# Altium PCB PCB1.PcbDoc (part 3 of 3)
Units mm, origin at the board's own origin, x right, y up, seen from the top; angles counter-clockwise.
Board outline 152.4 x 101.6 mm, 2 copper layers (Top Layer, Bottom Layer); 246 components, 0 nets, 683 pads, 311 vias.
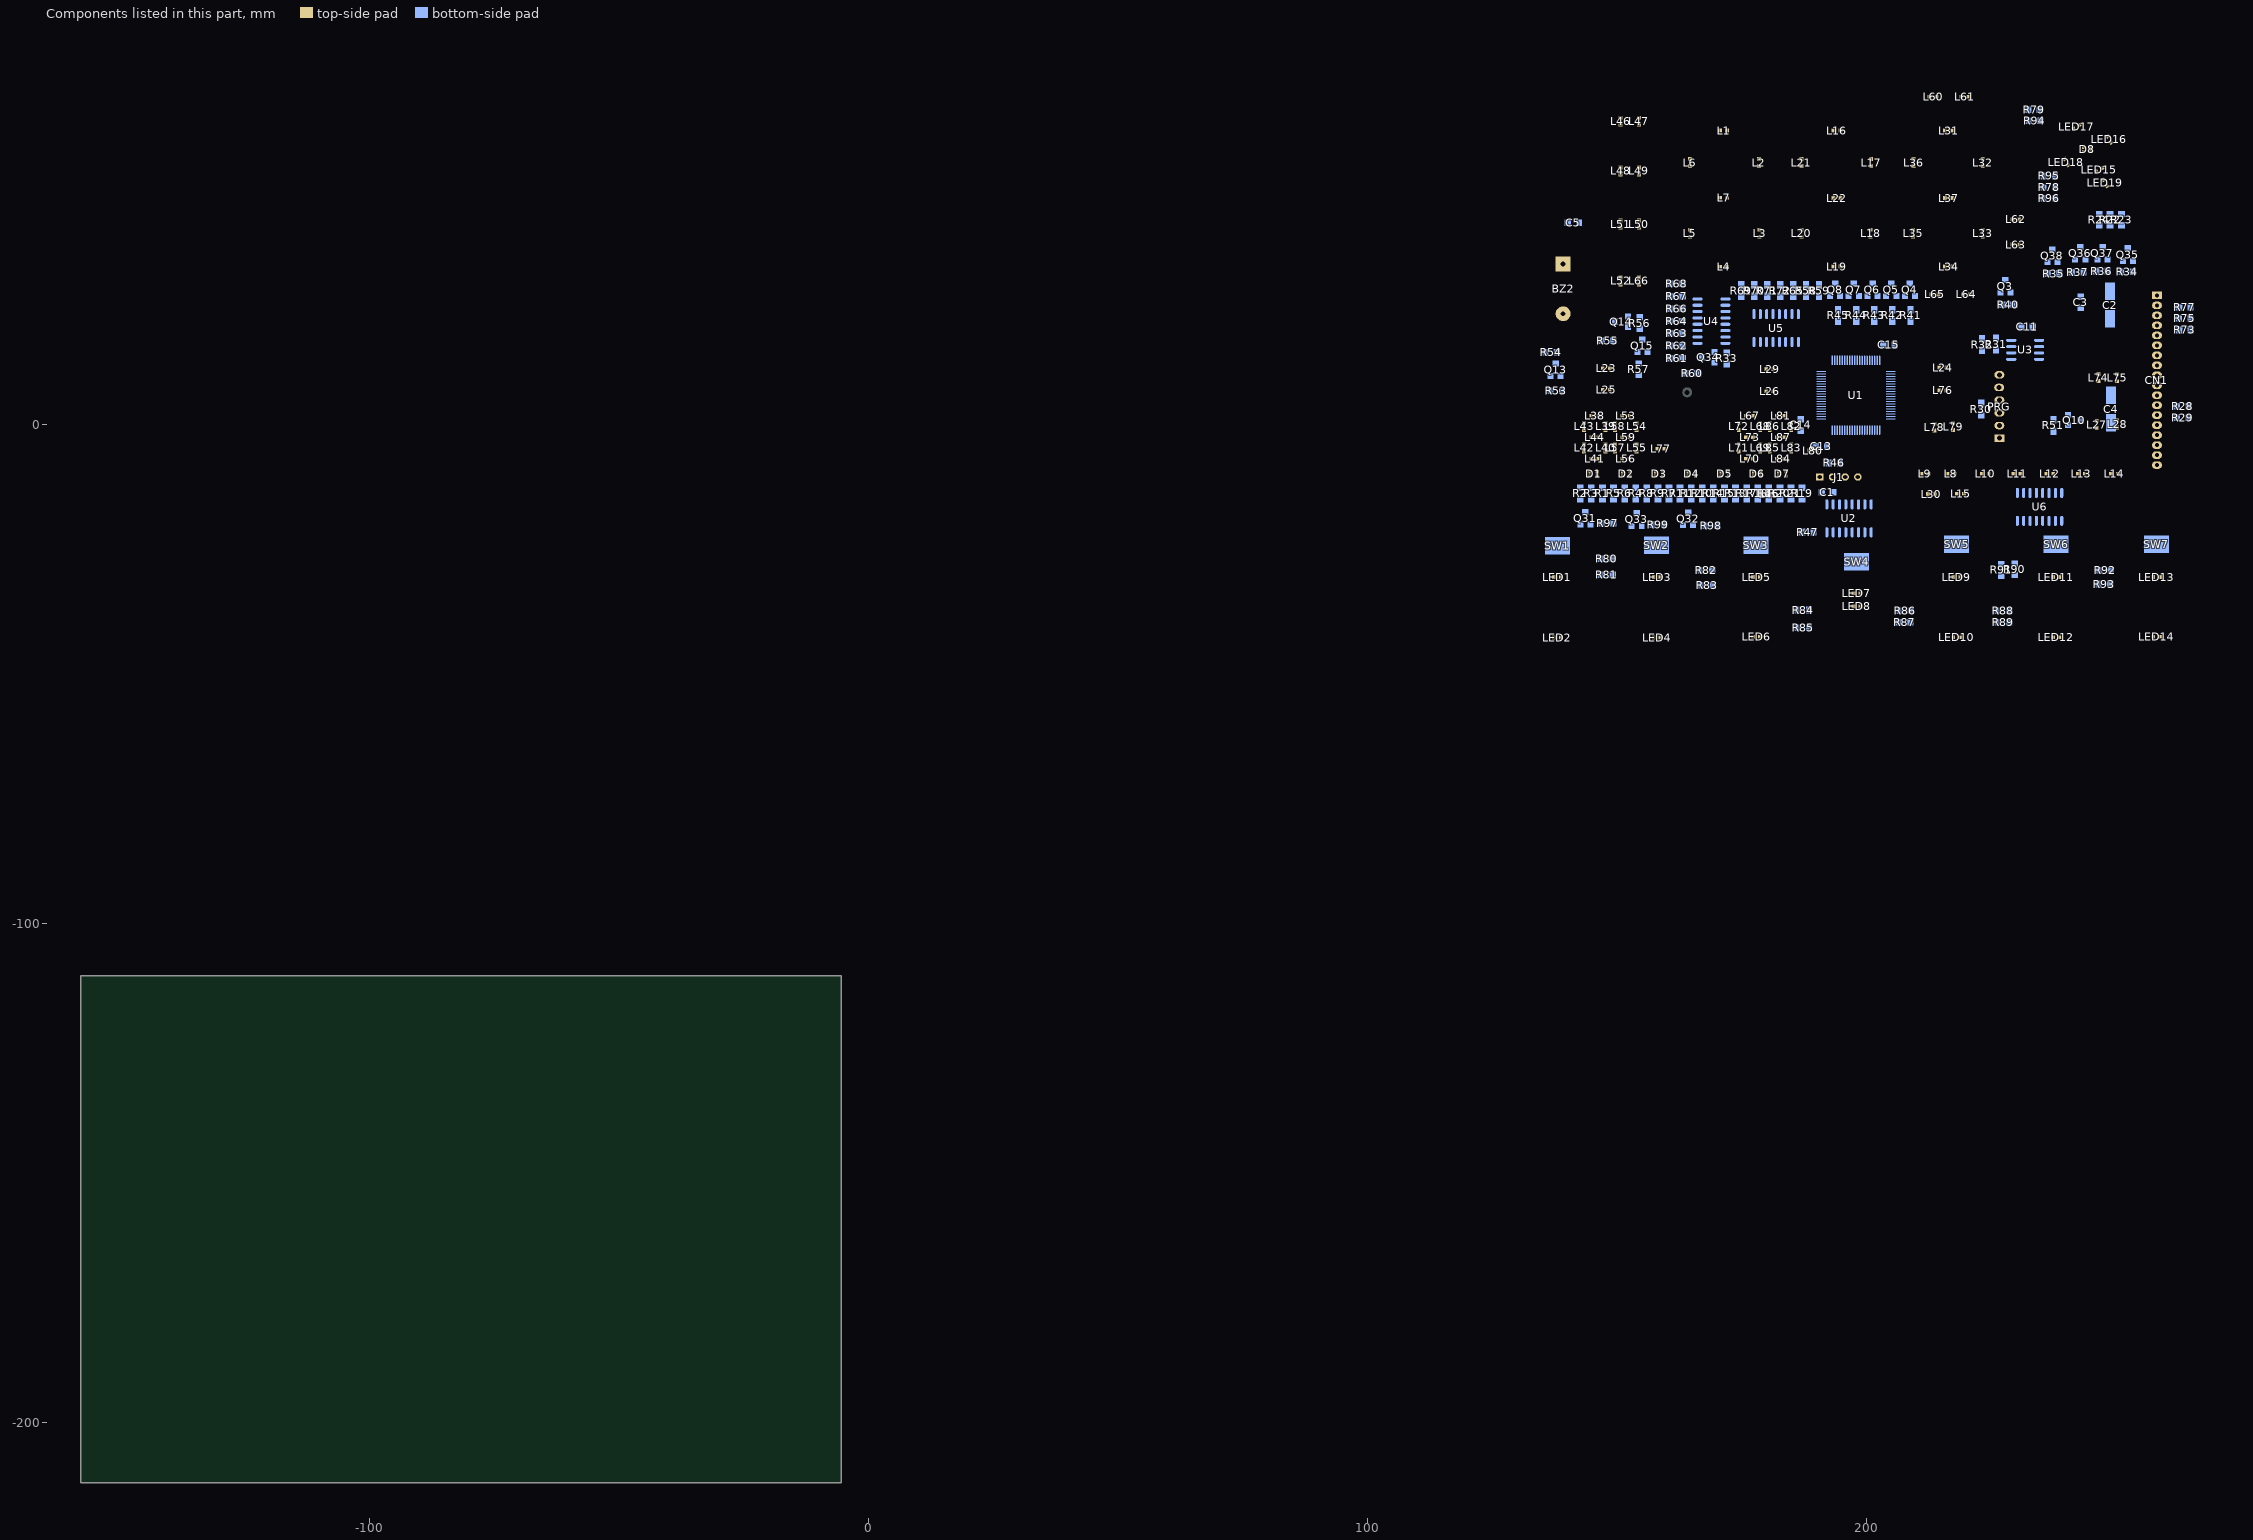
[diagram p3: the components of this part, seen from the top]

## Via types
v1: diameter 1, hole 0.6, Top Layer to Bottom Layer, 214 vias
v2: diameter 1.27, hole 0.711, Top Layer to Bottom Layer, 93 vias
v3: diameter 0.8, hole 0.4, Top Layer to Bottom Layer, 3 vias
v4: diameter 1, hole 0.5, Top Layer to Bottom Layer, 1 vias

## Nets (pads, with @x,y where several pads share a name; then routed paths per layer and width w, separated by ;. In a path a pad name is that pad's centre, name@x,y a point inside that pad or via, vN(x,y) a via of type N, cw(c..) or ccw(c..) an arc to the next point about the centre after c; other vN are vias at no path point) (continued)
copper on no net: (continued)
  Bottom Layer w0.254: 135.562,14.461 136.151,15.05 136.151,19.191 139.118,22.158 144.528,16.747 146.865,16.747 ; v2(136.235,-30.593) 136.235,-41.236 v2(136.412,-41.413) ; 136.59,6.72 136.59,7.101 138.61,9.12 138.61,9.635 ; v1(136.641,-3.313) 141.797,-3.313 142.94,-2.17 147.284,-2.17 147.639,-2.526 147.715,-2.526 v1(147.792,-2.45) ; v1(137.301,-0.088) 144.464,-0.088 v1(144.794,0.243) ; 137.602,12.178 137.602,14.215 137.848,14.461 ; v1(138.724,-6.463) 138.789,-6.398 143.92,-6.398 144.617,-5.701 v1(144.744,-5.701) ; 138.876,6.72 138.876,8.091 143.22,12.435 146.191,12.435 148.579,10.047 150.231,10.047 150.955,9.323 150.955,9.169 152.897,7.228 v2@156.199,7.228 ; v1(138.978,-4.507) 143.728,-4.507 v1(144.464,-3.771) ; v2(139.968,-42.556) 143.956,-38.569 143.956,-34.86 146.738,-32.079 146.738,-30.166 ; 140.007,40.369 139.118,39.48 139.118,32.164 139.118,30.976 149.528,20.565 149.151,20.187 149.151,16.747 ; v2(140.095,-30.542) 141.289,-30.542 144.89,-26.941 146.738,-26.941 ; 140.136,-23.434 140.365,-23.663 140.365,-25.215 143.775,-21.805 161.203,-21.805 162.676,-23.278 171.16,-23.278 173.598,-20.839 182.869,-20.839 186.019,-23.989 192.724,-23.989 193.22,-23.494 193.22,-21.643 ; v1(140.299,2.325) 147.309,2.325 147.792,1.843 147.919,1.843 v1(147.792,1.97) ; v1(142.051,-7.225) 144.515,-7.225 146.42,-5.32 v1(146.268,-5.168) ; 142.293,40.369 145.302,37.359 v1(145.302,36.946) ; 142.547,-15.003 142.547,-16.306 143.571,-17.33 143.571,-17.54 ; 142.547,-12.717 141.797,-11.968 141.797,-9.562 142.788,-8.571 v2(143.702,-8.571) ; v1(143.042,11.063) 142.737,10.758 142.737,4.23 v1(143.778,3.189) ; 144.579,-20.083 144.833,-19.829 146.865,-19.829 ; 144.769,-15.003 144.769,-17.817 v1(145.531,-18.579) ; 144.769,-12.717 144.769,-11.594 144.871,-11.492 v1@145.175,-11.492 ; v1(146.852,-16.394) 146.852,-15.143 146.992,-15.003 ; 146.992,-12.717 146.992,-11.429 v1(147.055,-11.365) ; v1(148.833,-11.289) 149.214,-11.67 149.214,-12.717 ; 149.024,-30.166 149.024,-26.941 ; v2@149.11,-17.54 149.214,-17.436 149.214,-15.003 ; 149.151,-19.829 150.586,-21.264 161.874,-21.264 162.403,-21.793 171.185,-21.793 172.741,-20.238 187.281,-20.238 188.907,-18.612 188.907,-11.571 188.581,-11.245 188.581,-8.876 ; 149.57,-27.113 v2(150.865,-25.818) ; v4@150.001,1.716 150.814,1.716 v1(152.592,-0.062) 152.592,-0.164 v1(151.221,-1.535) 151.221,-4.837 v1(150.738,-5.32) 151.957,-5.32 v1(153.532,-6.895) ; v4(150.001,2.021) 150.128,2.148 v1(150.128,8.98) ; v1(150.078,11.19) 150.103,11.19 152.973,8.32 157.276,8.32 ; v2(150.967,-42.455) 150.967,-35.724 v2(156.072,-30.618) ; 151.437,-15.003 151.437,-15.373 153.858,-17.794 152.819,-18.833 v1(151.881,-18.833) ; 151.437,-12.717 151.652,-12.501 v1@151.652,-11.543 ; v1@151.475,14.467 153.977,14.467 ; 152.072,21.573 152.199,21.446 154.485,21.446 ; 153.659,-15.003 153.837,-15.181 v1(153.837,-16.42) ; 153.659,-12.717 153.659,-11.111 v1(153.964,-10.806) ; v1(153.888,26.074) 150.941,29.021 150.941,54.37 160.539,63.968 199.281,63.968 204.561,58.688 204.561,45.69 208.342,41.909 208.342,35.615 207.278,34.551 207.278,29.427 208.469,28.237 208.607,28.237 211.517,28.237 v1(212.612,27.141) ; 154.231,12.302 156.009,14.08 156.009,14.461 ; 154.243,9.895 154.243,10.276 v1(155.869,11.901) ; 154.485,19.16 155.001,18.644 155.001,17.004 ; 154.866,-20.337 155.12,-20.083 157.025,-20.083 ; v1(155.259,29.808) 157.621,32.17 167.019,32.17 171.267,27.923 v1@172.531,27.923 ; 155.882,-15.003 155.882,-17.398 v1(156.123,-17.639) ; 155.882,-12.717 155.882,-11.149 v1@155.97,-11.06 ; v1(156.809,2.122) 156.809,2.249 157.276,2.717 157.276,8.32 ; v2(157.139,47.868) 157.139,44.388 168.518,33.009 v2(169.382,33.009) ; v1(157.774,-6.285) 157.774,-6.742 158.942,-7.911 168.874,-7.911 ; 158.104,-15.003 158.104,-17.715 158.51,-18.122 v1(158.51,-18.604) ; 158.104,-12.717 158.307,-12.514 v1@158.307,-11.619 ; v2(158.993,49.925) 168.061,40.857 168.061,37.86 170.448,35.472 172.836,35.472 v2(173.014,35.65) ; 159.311,-20.083 159.964,-20.083 160.53,-20.649 161.901,-20.649 162.591,-21.339 170.997,-21.339 172.553,-19.784 186.744,-19.784 188.453,-18.075 188.453,-11.759 188.127,-11.433 188.127,-8.497 ; v2(159.831,-42.963) 166.804,-35.99 166.804,-32.275 ; v2(159.831,-30.542) 165.361,-30.542 166.677,-29.227 ; 159.948,-25.088 160.177,-24.859 160.177,-23.536 160.783,-24.141 171.236,-24.141 173.801,-21.576 182.463,-21.576 185.333,-24.446 193.537,-24.446 194.49,-23.494 194.49,-21.643 ; 160.327,-15.003 160.161,-15.168 v1(160.161,-16.42) 160.161,-17.842 160.796,-18.477 163.334,-18.477 164.145,-17.667 ; 160.327,-12.717 160.327,-11.378 v1(160.492,-11.213) ; 160.708,13.258 160.708,3.608 164.352,-0.037 164.352,-1.358 165.267,-2.272 v1(165.419,-2.272) ; 160.708,15.739 160.57,15.739 159.552,14.721 159.552,11.206 160.085,10.673 160.085,2.554 v1(162.498,0.141) ; 160.708,18.219 159.098,16.61 159.098,11.012 159.631,10.479 159.631,0.646 v1@162.816,-2.539 ; 160.708,20.7 160.273,20.7 158.644,19.07 158.644,10.824 159.177,10.291 159.177,0.109 161.863,-2.577 161.863,-2.983 163.159,-4.279 163.159,-6.793 v1(163.133,-6.819) ; 160.708,23.18 160.708,22.559 159.619,21.47 159.619,21.01 158.18,19.572 158.18,10.59 158.723,10.047 158.723,-0.079 161.254,-2.609 161.254,-3.923 162.016,-4.685 162.016,-4.71 v1(161.99,-4.736) ; 160.708,28.141 158.485,25.919 158.485,21.155 157.276,19.946 157.276,8.32 ; v2(161.508,50.738) 161.508,51.754 163.895,54.141 165.749,54.141 v2(166.765,53.125) ; v1(161.939,60.212) 168.011,60.212 169.506,61.707 181.672,61.707 183.479,63.514 197.703,63.514 204.002,57.215 204.002,45.607 207.888,41.721 207.888,35.803 204.861,32.775 204.861,28.237 ; v1(162.422,-17.512) 162.422,-15.13 162.549,-15.003 ; 162.549,-12.717 v1@162.549,-11.264 ; 162.994,13.258 163.652,13.258 165.394,15 166.994,15 167.883,15.889 167.883,17.235 167.609,17.509 166.042,17.509 ; 162.994,15.739 164.251,16.996 164.251,18.124 164.906,18.779 166.042,18.779 ; 162.994,18.219 164.823,20.049 166.042,20.049 ; 162.994,20.7 163.613,21.319 166.042,21.319 ; 162.994,23.18 163.585,22.589 166.042,22.589 ; 162.994,25.661 164.795,23.859 166.042,23.859 ; 162.994,28.141 163.029,28.141 166.042,25.129 ; 164.252,10.778 166.927,13.453 ; 164.772,-15.003 164.772,-15.671 165.851,-16.75 165.851,-17.893 v1(166.511,-18.553) ; 164.772,-12.717 164.886,-12.603 v1@164.886,-11.568 ; 165.153,-20.21 165.28,-20.337 167.693,-20.337 ; v1(165.216,-4.736) 166.246,-3.706 166.246,-1.814 166.13,-1.698 166.13,3.976 166.003,3.849 v1(165.927,3.849) ; 166.08,10.225 170.906,10.225 177.459,3.672 177.459,1.157 178.754,-0.138 178.754,-0.57 177.383,-1.942 177.383,-2.882 182.31,-7.809 v1(185.307,-7.809) v1@185.46,-7.657 ; 166.994,-15.003 166.994,-16.267 v1(167.096,-16.369) ; 166.994,-12.717 166.994,-11.187 v1(167.146,-11.035) ; v1(168.924,-11.441) 169.217,-11.734 169.217,-12.717 ; 168.963,-29.227 169.09,-29.354 169.09,-32.275 ; 169.217,-15.003 169.331,-15.117 v1(169.331,-17.512) ; 169.464,12.429 169.464,11.971 v1(170.347,11.088) ; 169.471,14.461 169.641,14.461 171.884,12.219 171.884,12.048 ; v1(169.483,27.421) 169.509,27.395 v1(169.509,19.115) ; v2(169.864,40.375) 169.864,37.962 v2(170.245,37.581) ; v2(169.904,60.745) 176.036,54.613 176.036,51.881 v2(176.392,51.525) ; 169.979,-20.337 171.357,-20.337 172.365,-19.33 186.556,-19.33 187.999,-17.887 187.999,-11.947 187.67,-11.618 187.67,-8.47 ; v1(171.21,3.062) 175.147,3.062 v1(175.655,2.554) 175.732,2.478 175.732,-0.824 176.392,-1.485 v1@176.392,-1.612 ; v1(171.287,-18.884) 171.287,-15.156 171.439,-15.003 ; 171.439,-12.717 171.896,-12.26 v1(171.896,-11.492) ; 171.63,17.509 173.781,17.509 174.001,17.289 174.001,14.326 177.257,11.07 179.77,11.07 180.313,10.526 180.313,8.131 185.869,2.575 190.792,2.575 ; 171.63,18.779 173.496,18.779 174.455,17.819 174.455,14.514 177.446,11.524 180.42,11.524 180.767,11.177 180.767,8.319 186.011,3.075 190.792,3.075 ; 171.63,20.049 174.594,20.049 174.909,19.734 174.909,14.702 177.634,11.978 180.608,11.978 181.221,11.365 181.221,8.507 186.153,3.575 190.792,3.575 ; 171.63,21.319 174.188,21.319 175.363,20.143 175.363,14.89 177.822,12.432 181.433,12.432 181.675,12.189 181.675,8.695 186.295,4.075 190.792,4.075 ; 171.63,22.589 174.822,22.589 175.817,21.594 175.817,15.078 176.941,13.955 178.026,13.955 179.095,12.886 181.621,12.886 182.129,12.377 182.129,8.883 186.391,4.621 190.746,4.621 190.792,4.575 ; 171.63,23.859 171.773,23.715 174.338,23.715 176.271,21.782 176.271,15.266 177.129,14.409 178.214,14.409 179.283,13.34 181.809,13.34 182.583,12.565 182.583,9.071 186.58,5.075 190.792,5.075 ; 171.63,25.129 173.375,25.129 174.335,24.169 174.632,24.169 175.772,23.03 176.059,23.03 176.725,22.363 176.725,15.454 177.256,14.924 178.341,14.924 179.471,13.794 181.997,13.794 183.037,12.753 183.037,9.259 186.722,5.575 190.792,5.575 ; 171.884,14.334 173.351,14.334 177.069,10.616 179.582,10.616 179.859,10.338 179.859,7.943 185.727,2.075 190.792,2.075 ; v2(172.023,44.185) 172.709,44.185 174.109,42.784 174.109,33.837 174.805,33.141 174.805,27.923 v1@172.531,27.923 ; v1(172.328,5.475) 172.252,5.551 170.575,5.551 168.848,3.824 168.848,-4.609 168.874,-4.634 168.874,-7.911 ; v1(172.531,28.005) v1@172.531,27.923 ; v1(172.734,-17.944) 174.029,-17.944 174.297,-17.676 174.73,-17.676 175.884,-16.521 175.884,-15.003 ; v1(173.522,-16.496) 173.522,-15.143 173.662,-15.003 ; 173.662,-12.717 173.662,-10.997 v1(173.7,-10.959) ; v2(174.182,50.154) 174.563,49.773 174.563,34.025 177.402,31.186 177.402,27.923 ; v1(174.639,-18.503) 176.544,-18.503 178.107,-16.94 178.107,-15.003 ; 174.805,25.637 174.805,24.639 175.96,23.484 177.992,23.484 178.5,22.976 178.5,22.214 178.627,22.087 ; v1@175.782,-11.264 175.884,-11.365 175.884,-12.717 ; v1(175.859,7.507) 175.859,9.26 176.443,9.844 177.308,9.844 181.766,5.386 181.766,4.75 v1(181.828,4.688) ; v2(176.062,-30.593) 174.662,-31.993 v2(174.662,-40.042) 178.548,-43.928 187.72,-43.928 192.229,-39.419 ; v2(176.087,41.01) 176.976,40.121 176.976,34.152 180,31.128 180,27.923 ; v1(177.179,8.625) 177.459,8.345 177.459,7.409 178.351,6.516 179.993,6.516 180.837,5.672 180.837,3.57 v1(181.218,3.189) ; 177.402,25.637 177.402,25.471 179.897,22.976 179.897,22.087 ; v1(177.459,-0.57) 176.417,-1.612 v1@176.392,-1.612 ; 177.726,-25.088 194.064,-25.088 195.76,-23.392 195.76,-21.643 ; v1(178.094,-7.047) 177.611,-6.565 v1(177.611,-4.66) 176.773,-4.66 176.163,-4.05 v1(176.163,-1.612) v1@176.392,-1.612 ; 178.107,-12.717 178.17,-12.654 v1@178.17,-11.645 ; v1(178.475,-2.424) 178.653,-2.424 179.415,-1.662 179.415,2.427 v1(178.881,2.96) ; v2(178.5,36.184) 179.262,36.184 185.195,30.251 185.195,27.923 ; 178.627,16.499 178.627,15.279 178.932,14.975 179.687,14.975 180.414,14.248 182.185,14.248 183.491,12.941 183.491,9.447 186.864,6.075 190.792,6.075 ; v1(178.78,5.119) 180.126,3.773 180.126,-2.145 180.939,-2.958 180.939,-3.821 v1(182.691,-5.574) ; v2(179.415,34.38) 179.415,33.872 182.597,30.69 182.597,27.923 ; v1(179.694,-11.416) 180.202,-11.924 180.202,-12.59 180.329,-12.717 ; 179.897,16.499 179.897,15.406 180.602,14.702 182.373,14.702 183.945,13.129 183.945,9.635 187.006,6.575 190.792,6.575 ; v2(179.948,-30.644) 186.108,-36.803 186.108,-37.228 ; 180,25.637 181.167,24.469 181.167,22.087 ; v2(180.024,-42.379) 184.513,-42.379 186.108,-40.784 ; 180.329,-15.003 180.354,-15.028 180.354,-17.69 181.142,-18.477 v1(181.193,-18.477) ; 181.167,16.499 181.167,15.787 181.799,15.156 182.561,15.156 183.339,14.377 183.986,14.377 184.399,13.963 184.399,9.823 187.148,7.075 190.792,7.075 ; v1(181.548,-11.568) 182.552,-12.572 182.552,-12.717 ; 182.437,16.499 182.437,15.965 183.571,14.831 184.174,14.831 184.853,14.152 184.853,10.011 187.29,7.575 190.792,7.575 ; 182.437,22.087 182.437,25.477 182.597,25.637 ; 182.552,-15.003 182.552,-16.737 v1(184.241,-18.426) ; 183.033,-4.747 182.437,-4.152 182.437,-3.034 182.934,-2.537 184.709,-2.537 v1(184.825,-2.653) 184.825,1.36 v2(184.85,1.386) ; 183.034,-4.747 184.928,-6.641 185.613,-6.641 186.73,-7.757 186.73,-8.114 186.208,-8.636 181.74,-8.636 181.015,-7.911 168.874,-7.911 ; v1@183.047,-3.364 183.047,-3.288 v1@183.124,-3.211 ; v1@183.58,19.521 183.326,19.775 v1(183.326,19.801) 186.908,19.801 v1(187.898,18.81) ; 183.707,16.499 183.707,15.94 185.307,14.34 185.307,10.199 187.432,8.075 190.792,8.075 ; 183.707,22.087 183.707,24.149 185.195,25.637 ; 184.291,-15.486 184.774,-15.003 184.774,-16.979 186.044,-18.249 v1(186.044,-18.426) ; 184.774,-12.717 184.774,-11.391 v1(185.104,-11.06) ; 184.977,16.499 184.977,15.381 185.793,14.565 185.793,10.367 187.585,8.575 190.792,8.575 ; 184.977,22.087 184.977,23.357 185.993,24.373 186.528,24.373 187.792,25.637 ; 186.247,16.499 186.247,10.555 187.727,9.075 190.792,9.075 ; 186.247,22.087 186.84,22.087 190.39,25.637 ; v1(186.781,-16.521) 186.997,-16.305 186.997,-15.003 ; v1(186.781,-11.035) 186.781,-12.501 186.997,-12.717 ; 187.009,-21.601 187.009,-22.719 v1(187.289,-22.998) ; 187.035,1.538 187.072,1.575 190.792,1.575 191.765,1.575 192.284,2.094 192.284,2.3 192.695,2.711 192.695,3.109 193.766,4.18 193.766,6.364 194.299,6.897 194.731,6.897 v3(194.985,7.151) ; 187.792,27.923 187.792,55.382 v2(187.898,55.488) ; 188.394,-40.784 v2@188.394,-38.924 ; 188.394,-37.228 v2@188.394,-38.924 ; v2(188.432,-38.924) v2@188.394,-38.924 ; v2(190.311,61.711) 190.39,61.632 190.39,27.923 ; 190.553,-10.558 190.934,-10.939 190.934,-13.606 191.95,-14.622 191.95,-16.055 ; 190.705,-0.557 190.882,-0.38 191.516,-0.38 191.682,-0.215 191.682,0.213 192.658,1.189 193.188,1.189 193.188,1.925 200.337,9.075 204.792,9.075 ; 190.792,9.575 188.497,9.575 187.162,10.911 187.162,15.584 192.267,20.69 194.197,20.69 ; 190.792,10.075 188.639,10.075 187.619,11.095 187.619,15.203 191.53,19.115 196.255,19.115 197.83,20.69 ; 190.792,10.575 188.945,10.575 188.101,11.419 188.101,15.044 191.718,18.661 196.443,18.661 197.379,19.597 199.176,19.597 200.268,20.69 201.462,20.69 ; 190.94,-0.965 191.07,-0.834 191.792,-0.834 192.136,-0.491 192.136,0.025 192.846,0.735 193.41,0.735 193.642,0.967 193.642,1.737 200.479,8.575 204.792,8.575 ; 191.258,-1.288 191.981,-1.288 192.59,-0.679 192.59,-0.163 192.854,0.102 193.65,0.102 194.096,0.547 194.096,1.549 200.621,8.075 204.792,8.075 ; v2(191.53,31.688) 191.657,31.561 191.657,29.402 192.823,28.237 193.621,28.237 193.621,28.186 194.658,28.186 v1(195.518,29.046) ; 191.95,-21.643 189.336,-21.643 189.295,-21.601 189.295,-19.925 189.854,-19.366 189.854,-11.899 189.476,-11.52 189.476,-9.635 191.178,-7.933 191.178,-7.101 191.547,-6.731 191.923,-6.731 193.542,-5.112 193.542,-1.175 ; 192.318,-7.733 193.093,-8.508 193.093,-10.558 193.22,-10.685 ; v3(192.826,29.707) 194.553,31.434 194.553,32.069 194.959,32.475 v1(197.093,32.475) ; 193.042,12.825 193.042,17.153 194.096,18.207 196.631,18.207 197.568,19.143 199.364,19.143 199.716,19.496 203.9,19.496 205.094,20.69 ; 193.542,12.825 193.542,16.96 194.334,17.753 196.819,17.753 197.756,18.689 199.585,18.689 199.938,19.042 204.088,19.042 204.647,19.601 205.864,19.601 206.953,20.69 208.726,20.69 ; 194.042,-1.175 194.042,-3.11 194.299,-3.368 194.299,-15.864 194.49,-16.055 ; 194.042,12.825 194.042,16.737 194.604,17.299 197.007,17.299 197.944,18.235 200.017,18.235 200.37,18.588 204.276,18.588 204.835,19.147 209.545,19.147 213.374,22.976 224.347,22.976 ; 194.197,22.976 194.197,25.262 194.629,25.693 ; 194.542,12.825 194.542,16.376 195.01,16.845 197.195,16.845 198.132,17.781 200.246,17.781 200.598,18.134 204.464,18.134 205.023,18.693 209.733,18.693 212.578,21.537 ; v1(194.655,67.121) 201.005,67.121 211.749,56.377 v2(216.727,56.377) 216.092,55.742 v2(216.092,53.456) ; 195.042,-1.175 195.042,-3.599 195.633,-4.19 195.633,-10.558 195.76,-10.685 195.76,-16.055 ; 195.042,12.825 195.042,16.041 195.391,16.391 197.383,16.391 198.32,17.327 200.551,17.327 200.903,17.68 204.652,17.68 205.211,18.239 209.922,18.239 213.044,21.361 ; 195.542,-1.175 195.542,-3.413 196.306,-4.177 196.306,-8.691 198.173,-10.558 197.03,-11.701 197.03,-16.055 ; 195.542,12.825 195.542,15.719 195.76,15.937 197.579,15.937 198.515,16.873 200.739,16.873 201.091,17.226 204.84,17.226 205.399,17.785 210.222,17.785 212.562,20.124 ; v1(196.509,15.051) 197.042,14.518 197.042,12.825 ; v1(196.89,2.808) 196.89,3.037 198.428,4.575 204.792,4.575 ; 197.03,-25.72 197.03,-21.643 ; v2(197.042,55.996) 197.042,53.583 v2(192.216,48.757) v2(192.216,45.074) 192.216,43.423 v2(197.55,38.089) 198.312,37.327 v2(198.312,31.231) 197.368,30.286 197.368,28.237 ; v2(197.118,-35.241) 196.407,-35.241 192.229,-39.419 ; 197.542,12.825 197.542,15.258 198.402,16.118 200.116,16.118 v1(200.192,16.041) ; 197.83,22.976 197.83,25.147 198.376,25.693 ; 198.042,-1.175 198.042,-8.605 199.608,-10.171 199.608,-10.646 198.3,-11.954 198.3,-16.055 ; 198.3,-21.643 198.3,-23.672 199.589,-24.961 217.985,-24.961 ; 198.542,-1.175 198.542,-8.463 200.062,-9.983 200.062,-15.416 199.57,-15.908 199.57,-16.055 ; 199.042,-1.175 199.042,-8.321 200.84,-10.119 200.84,-16.055 ; 199.542,-3.517 199.542,-1.175 ; 199.57,-21.643 199.57,-23.672 199.938,-24.04 207.812,-24.04 210.504,-21.347 223.001,-21.347 226.201,-24.548 235.371,-24.548 235.396,-24.522 ; v2@199.658,-33.844 201.894,-33.844 205.404,-37.355 206.519,-37.355 ; 200.042,-3.542 200.042,-1.175 ; v2(200.42,-36.46) 201.03,-36.46 204.211,-39.641 206.392,-39.641 ; 200.542,-3.728 200.542,-1.175 ; 200.84,-21.643 209.567,-21.643 210.316,-20.893 223.563,-20.893 226.608,-23.938 232.856,-23.938 234.99,-21.805 252.443,-21.805 255.599,-24.961 257.99,-24.961 ; 201.042,-2.196 201.042,-1.175 ; 201.114,28.237 201.114,30.654 v1(206.364,35.904) ; 201.462,22.976 201.462,25.033 202.122,25.693 ; 201.542,-3.444 201.542,-1.175 ; 205.094,22.976 205.869,23.75 205.869,25.693 ; v2(205.805,50.789) 209.234,47.36 209.234,39.028 211.876,36.387 v2(211.876,31.993) ; 205.843,-12.788 205.843,-15.078 209.122,-18.356 221.499,-18.356 223.747,-16.109 232.456,-16.109 233.948,-14.616 233.948,-13.753 ; 206.297,-13.321 206.297,-14.89 209.31,-17.902 221.311,-17.902 223.559,-15.655 231.488,-15.655 232.678,-14.464 232.678,-13.753 ; 206.751,-14.702 209.498,-17.448 221.123,-17.448 223.371,-15.201 230.596,-15.201 231.408,-14.388 231.408,-13.753 ; 207.205,-13.854 207.205,-14.514 209.686,-16.994 220.935,-16.994 224.176,-13.753 230.138,-13.753 ; 208.091,-14.758 209.874,-16.54 220.747,-16.54 225.166,-12.121 234.787,-12.121 235.218,-12.553 235.218,-13.753 ; v1@208.472,31.358 v1@208.586,31.243 ; v1(208.625,31.281) v1@208.586,31.243 ; 208.726,22.976 208.726,23.077 209.615,23.966 209.615,25.693 ; 208.805,-37.355 208.678,-37.482 208.678,-39.641 210.651,-39.641 v2(211.139,-39.153) ; v1(209.107,34.99) 208.955,34.837 208.955,33.771 209.59,33.136 209.59,32.323 v1(211.622,30.291) ; v1(209.666,-3.517) 210.225,-4.075 v1(210.225,-6.539) ; 210.062,-16.086 220.268,-16.086 224.688,-11.667 235.93,-11.667 236.488,-12.226 236.488,-13.753 ; 210.606,-15.632 220.08,-15.632 224.5,-11.213 237.073,-11.213 237.758,-11.899 237.758,-13.753 ; 211.368,15.254 211.368,15.58 215.157,19.37 220.384,19.37 v1(220.842,18.912) ; v2(211.546,39.282) 213.044,39.282 218.861,33.466 218.861,28.386 ; v2(215.991,-30.618) 215.991,-41.439 v2(216.524,-41.972) 215.457,-43.039 195.848,-43.039 192.229,-39.419 ; v1(216.727,-11.365) 217.261,-11.899 v1(219.47,-11.899) ; 219.039,16.219 220.416,14.842 223.065,14.842 223.065,14.022 224.058,13.028 228.907,13.028 ; v2(220.055,-30.517) 226.204,-36.666 226.204,-37.355 ; v2(220.69,-42.709) 223.136,-42.709 226.204,-39.641 ; v2(221.883,36.387) 222.772,37.276 228.183,37.276 v2(230.443,39.536) ; 222.874,1.894 224.835,-0.067 226.494,-0.067 ; 222.874,4.18 223.707,5.013 226.494,5.013 ; 223.065,17.128 223.354,16.838 228.03,16.838 228.907,16.838 ; 225.033,12.206 230.545,12.206 230.951,12.612 230.951,13.578 230.23,14.298 228.907,14.298 227.243,14.298 ; v1(225.135,51.754) 225.363,51.525 v1(227.878,51.525) ; 225.859,14.933 226.494,14.298 227.243,14.298 ; 226.887,-30.314 227.294,-30.72 227.294,-33.565 v2(234.939,-41.21) ; 226.887,-28.028 229.478,-28.028 229.605,-27.901 229.986,-27.52 v2@229.986,-26.707 ; v2(227.014,-22.084) 227.167,-21.932 231.612,-21.932 232.678,-20.865 232.678,-19.341 ; 227.243,14.365 227.243,14.298 ; v2(227.471,-20.611) 228.056,-21.195 231.129,-21.195 231.408,-20.916 231.408,-19.341 ; v2(227.573,34.609) 227.624,34.558 v2(227.624,31.612) ; 227.733,28.948 226.433,28.948 v1(225.465,27.979) 224.538,27.053 223.859,27.053 222.144,25.338 217.769,25.338 214.136,28.97 211.114,28.97 210.479,29.605 210.225,29.605 v1@208.586,31.243 ; 228.49,-39.641 228.49,-38.543 ; 228.49,-37.355 228.49,-38.543 ; v2(228.818,-19.417) 228.894,-19.341 230.138,-19.341 ; v2(228.868,-22.897) 228.995,-22.77 232.12,-22.77 233.948,-20.941 233.948,-19.341 ; 228.907,15.568 v1@232.069,15.568 ; 229.605,-30.187 229.986,-30.568 v2(235.879,-30.568) ; v2(230.316,-38.442) 228.592,-38.442 228.49,-38.543 ; v1(230.545,17.235) 230.545,19.112 230.939,19.505 ; v1(232.043,15.559) 232.059,15.559 v1@232.069,15.568 ; 232.139,22.074 237.616,27.551 240.309,27.551 241.982,29.224 245.531,29.224 245.925,29.618 245.925,30.717 ; 232.336,63.052 232.336,60.943 232.463,60.816 232.653,60.626 232.653,52.498 235.384,49.767 235.384,47.481 235.384,45.322 235.384,40.59 237.17,38.804 237.17,35.038 ; 233.225,19.505 234.495,18.235 234.495,16.838 234.495,15.568 ; 233.783,24.36 237.428,28.005 240.121,28.005 241.099,28.983 241.099,30.463 ; 233.994,23.286 237.804,27.097 240.497,27.097 242.17,28.77 245.813,28.77 246.623,29.58 249.994,29.58 251.005,30.59 ; 234.19,-24.459 235.194,-24.459 235.533,-24.12 235.533,-23.409 235.762,-23.18 ; 234.495,13.028 234.495,14.298 234.495,15.568 ; 234.622,63.052 247.949,63.052 v2(249.925,61.076) ; v1(234.685,28.513) 234.685,28.621 236.273,30.209 ; 234.749,60.816 234.794,60.771 v2(236.234,60.771) ; v2(234.761,-17.131) 235.218,-17.588 235.218,-19.341 ; 236.488,-19.341 236.488,-17.131 v2(236.666,-16.953) ; 237.67,45.322 245.322,45.322 v2(246.572,46.572) ; 237.67,47.481 240.674,47.481 242.94,49.747 246.14,49.747 v2(248.147,51.754) ; 237.67,49.767 239.644,49.767 v2(239.663,49.747) ; 237.758,-19.341 237.758,-17.918 238.241,-17.436 240.654,-17.436 v2(241.441,-18.223) ; 238.178,32.495 238.559,32.114 238.559,30.209 ; v2(239.714,-30.568) 240.324,-31.177 240.324,-38.772 v2(238.597,-40.499) 239.13,-40.499 241.187,-42.556 v2(259.882,-42.556) 260.187,-42.252 v2(260.187,-30.974) ; v1(240.171,3.189) 240.279,3.081 240.279,1.868 ; v1(241.289,18.277) 241.289,24.855 242.026,25.592 242.864,25.592 243.914,26.642 248.719,26.642 257.298,26.642 258.117,25.823 ; 242.758,35.546 242.758,36.059 246.56,39.861 ; 242.864,23.306 245.028,21.142 248.719,21.142 251.4,23.823 258.117,23.823 ; v1(243.296,16.524) v1@243.296,16.88 ; 243.385,30.463 243.385,32.622 243.766,33.003 ; v2(244.439,43.321) 245.613,42.147 246.56,42.147 ; v2(245.785,53.684) 249.061,53.684 251.005,51.741 251.005,42.147 ; v2(245.937,-27.342) 246.56,-27.964 246.56,-29.227 246.433,-29.354 246.433,-32.021 ; v1(246.293,5.018) 247.094,5.819 248.934,5.819 ; 247.203,35.546 247.203,35.925 248.719,37.441 248.719,39.861 ; v2(248.147,43.88) 248.719,43.308 248.719,42.147 ; 248.211,30.717 248.211,33.003 ; 248.719,-32.021 248.719,-32.155 v2(249.874,-33.311) ; 248.846,-29.227 252.318,-29.227 253.735,-30.644 v2(255.97,-30.644) ; 251.005,39.861 252.283,38.583 252.283,35.292 ; 253.291,30.59 253.291,32.749 ; v1@232.069,15.568 234.495,15.568
  Bottom Layer w0.3: v2(151.271,-20.204) 151.398,-20.331 152.834,-20.331 ; v1(161.838,-19.468) 162.574,-20.204 163.121,-20.204
  Bottom Layer w0.6: 135.904,9.107 134.228,7.431 v1(134.228,5.526) 134.228,-8.266 131.307,-11.187 131.307,-19.442 132.526,-20.662 v1(141.061,-20.662) 141.962,-20.662 142.547,-20.077 ; v1(143.398,-9.906) 149.279,-9.906 v1(150.179,-10.806) 150.306,-10.806 151.306,-9.806 157.815,-9.806 157.825,-9.816 169.839,-9.816 180.964,-9.816 181.421,-10.273 182.107,-9.587 v1(186.831,-9.587) ; v1(151.856,17.819) 151.856,19.331 152.065,19.541 ; v1(169.305,16.295) 171.573,16.295 171.63,16.239 ; 177.357,16.499 177.357,17.591 v1(178.424,18.658) 186.527,18.658 187.543,17.642 188.332,17.642 190.972,20.281 190.972,21.045 190.616,21.401 190.718,21.502 v1(190.895,21.502) ; v1(187.314,21.325) 188.406,22.417 v3(189.371,22.417) ; v1(191.886,24.22) 192.597,24.931 192.597,25.7 ; 193.093,-10.558 193.093,-13.479 193.22,-13.606 193.22,-16.055 193.22,-17.22 v1(191.886,-18.553) 201.944,-18.553 202.91,-19.519 225.287,-19.519 227.141,-17.664 232.623,-17.664 234.469,-15.818 239.782,-15.818 239.79,-15.81 252.059,-15.81 256.478,-20.23 261.634,-20.23 264.581,-17.283 264.581,3.468 264.428,3.621 ; v1(196.077,27.09) 196.077,25.967 196.344,25.7 ; v1(199.76,27.014) 200.09,26.684 200.09,25.7 ; v1(203.392,27.116) 203.837,26.671 203.837,25.7 ; v1(207.228,27.09) 207.228,26.055 207.583,25.7 ; 228.907,16.838 230.148,16.838 v1(230.545,17.235)
  Bottom Layer w0.63: v1(210.733,22.62) 211.977,23.865 221.909,23.865 222.772,24.728 ; v1(223.407,23.941) 223.407,24.093 222.772,24.728 ; v1(224.652,18.658) 226.735,18.658 228.03,17.362 228.03,16.838 ; 225.859,17.219 225.859,17.476 ; 226.709,26.411 224.125,26.411 223.331,25.617 223.331,25.287 222.772,24.728 ; 264.428,3.621 261.33,6.72 261.33,13.781 264.835,17.286 264.835,18.912
  Bottom Layer w1: v1(144.693,15.381) 145.607,14.467 151.475,14.467 v1(151.703,14.695) ; v1(215.635,17.515) 216.866,17.515 217.337,17.044 218.694,17.044 218.696,17.046 220.498,17.046 220.969,16.575 220.969,16.016 v1(221.325,16.016) ; v1(227.421,15.533) 228.872,15.533 228.907,15.568 ; v1(235.498,34.101) 236.146,33.453 236.146,32.501 ; 239.028,-13.753 250.687,-13.753 253.811,-10.629 259.526,-10.629 261.076,-9.079 v1(261.05,-9.054) ; v1(240.019,34.558) 240.185,34.558 241.734,33.009 ; v1(243.296,16.524) 244.101,16.524 248.719,21.142 ; v1(245.302,34.634) 246.179,33.758 246.179,33.009 ; v1(250.255,34.253) 251.259,33.25 251.259,32.755 ; v1(252.643,49.798) 252.643,48.376 254.319,46.699 254.319,44.286 264.835,33.771 264.835,23.839 264.835,23.484
  other v1: 151.856,-11.416 145.277,-11.391 158.383,-11.391 175.528,-11.391 178.17,-11.391 164.962,-11.365 183.352,-3.364 163.032,-2.704 148.427,-0.951 188.381,1.106
  other v2: 200.166,-33.717 230.011,-26.25 148.884,-17.766 142.305,-16.598 203.849,14.238 177.357,31.459

## Keep-outs
Keep-Out Layer:
  circle w0.127: c159.975,66.41 r1.4
  circle w0.127: c235.975,66.41 r1.4
  circle w0.127: c259.276,-15.174 r1.6
  circle w0.127: c147.475,-37.59 r1.4
  circle w0.127: c248.475,-37.59 r1.4
  circle w0.127: c231.975,6.41 r1.4
  circle w0.127: c163.975,6.41 r1.4
  circle w0.127: c135.173,46.826 r1.6
  lines w0.127: 152.24,71.037 143.02,63.307 143.02,52.768 134.002,52.768 ccw(c134.819,50.942) 133.064,51.901 129.359,45.119 ccw(c146.911,35.531) 128.411,43.132 128.411,16.283 ccw(c128.911,18.219) 128.661,16.235 cw(c127.975,10.778) 128.661,5.321 ccw(c128.911,3.337) 128.411,5.273 128.411,-39.025 ccw(c141.911,-32.486) 133.618,-44.985 262.342,-44.985 ; 152.258,71.017 243.708,71.017 ; 243.72,71.031 253.057,63.307 253.057,52.768 261.947,52.768 cw(c261.131,50.942) 262.886,51.901 266.591,45.119 cw(c249.039,35.531) 267.41,43.436 267.41,16.254 cw(c267.039,18.219) 267.288,16.235 ccw(c267.975,10.778) 267.289,5.321 cw(c267.039,3.337) 267.41,5.302 267.41,-39.284 cw(c254.039,-32.486) 262.298,-45.007 ; 136.873,-17.867 cw(c136.673,-15.174) 136.873,-12.482 136.873,-13.587 cw(c136.673,-15.174) 136.874,-16.762 136.873,-17.867 ; 260.976,44.133 cw(c260.776,46.826) 260.976,49.518 260.976,48.413 cw(c260.776,46.826) 260.976,45.238 260.976,44.133

## Silkscreen, mask and mechanical layers (free items; w line width, h text height)
Top Overlay:
  drawing of 4685 lines, arcs and shapes, not listed
Bottom Overlay:
  circle w0.127: c159.975,66.41 r2.25
  circle w0.127: c235.975,66.41 r2.25
  circle w0.127: c231.975,6.41 r2.25
  circle w0.127: c163.975,6.41 r2.25
  circle w0.127: c248.475,-37.59 r2.25
  circle w0.127: c147.475,-37.59 r2.25
Mechanical 3:
  drawing of 3226 lines, arcs and shapes, not listed

## Dimensions
243.708,71.017 to 262.342,-44.985 on Top Overlay
128.411,-39.025 to 267.41,-39.284 on Top Overlay

## Text inside footprints (layer, text, board x,y; h text height)
BZ2: Bottom Overlay "+" at 134.292,37.829 h0.8 r90
C2: Bottom Overlay "+" at 245.159,19.063 h1.5 r270
C4: Bottom Overlay "+" at 245.374,-1.759 h1.5 r270
U1: Bottom Overlay "+" at 197.152,5.186 h2